# Altium PCB FS612B_2024-07-17.pcbdoc
Units mm, origin at the board's own origin, x right, y up, seen from the top; angles counter-clockwise.
Board outline 29.72 x 29.05 mm, 2 copper layers (Top Layer, Bottom Layer); 1 components, 0 nets, 6 pads, 0 vias.
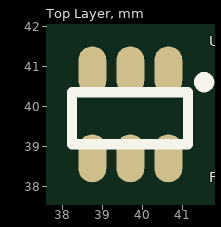
[diagram p0: Top Layer view]
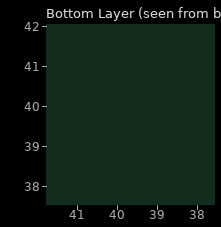
[diagram p1: Bottom Layer view, seen from below]

## Layer stack, top to bottom
Top Layer: signal copper (thickness not stored)
Dielectric: dielectric 0.32, FR-4, Dk 4.8
Bottom Layer: signal copper (thickness not stored)

## Board outline
55.118,25.4 25.4,25.4 25.4,54.454 55.118,54.454

## Components (designator, comment, footprint, x,y, rotation, side; value= is the part's Value field where it differs from the comment)
U? "FS612B" FS612B 39.878,39.8 r0 top

## Footprints (in the part's own frame and the unit in brackets; to place one, negate y for a bottom-side part, rotate by r counter-clockwise, add the part's x,y. Pads: shape width x height; smd on the part's side, far side on the other; paste and mask are expansions set on the pad)
FS612B [mm]
  oval 0.7x1.2 smd paste+0.102 mask+0.051: 1(0.757,1.1) ""(-0.193,-1.1)
  oval 0.7x1.2 smd paste+0 mask+0.051: 2(-0.193,1.1) 3(-1.143,1.1) 4(-1.143,-1.1) 5(0.757,-1.1)
  silkscreen extent -1.65,-0.75 1.78,0.93

## Nets (pads, with @x,y where several pads share a name; then routed paths per layer and width w, separated by ;. In a path a pad name is that pad's centre, name@x,y a point inside that pad or via, vN(x,y) a via of type N, cw(c..) or ccw(c..) an arc to the next point about the centre after c; other vN are vias at no path point)
pads on no net: U?. U?.1 U?.2 U?.3 U?.4 U?.5

## Silkscreen, mask and mechanical layers (free items; w line width, h text height)
Document:
  lines w0.003: 40.259,39.927 40.259,39.927